# Altium PCB 112J-T.pcbdoc
Units mm, origin at the board's own origin, x right, y up, seen from the top; angles counter-clockwise.
Board outline 29.4 x 30.4 mm, 2 copper layers (Top Layer, Bottom Layer); 1 components, 0 nets, 13 pads, 0 vias.
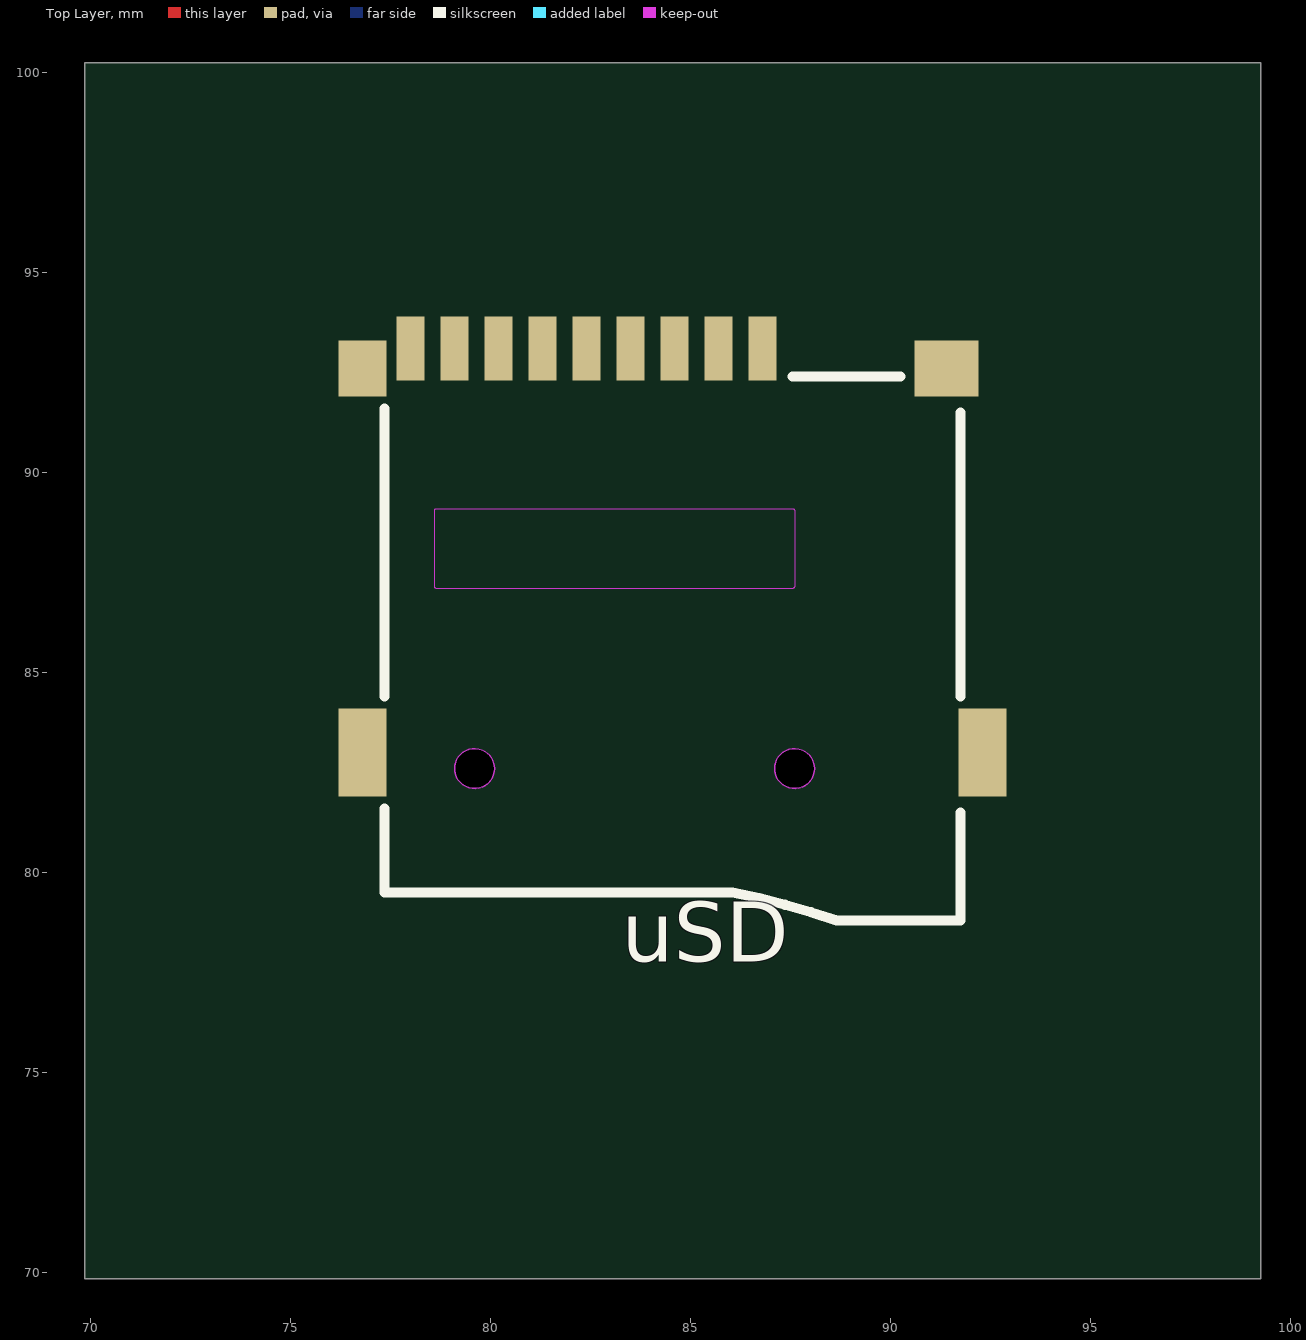
[diagram p0: Top Layer view]
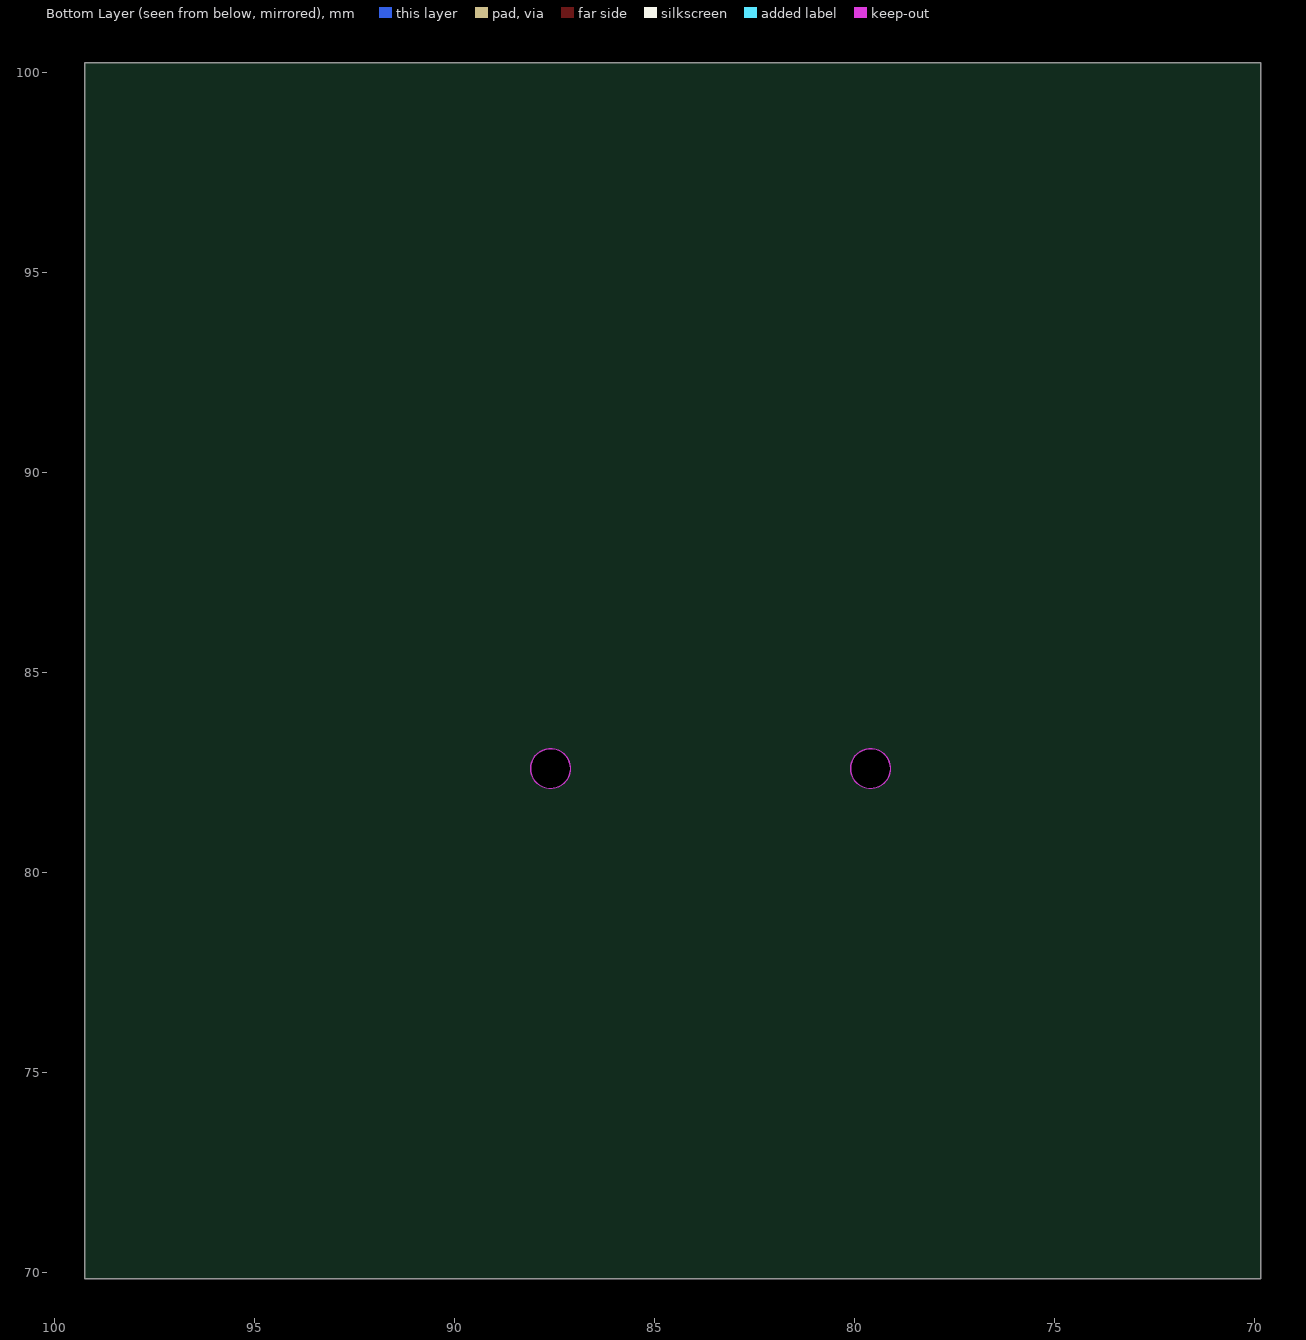
[diagram p1: Bottom Layer view, seen from below]

## Layer stack, top to bottom
Top Layer: signal copper (thickness not stored)
Dielectric: dielectric 0.32, FR-4, Dk 4.8
Bottom Layer: signal copper (thickness not stored)

## Board outline
99.25,69.85 69.85,69.85 69.85,100.25 99.25,100.25

## Design rules (kind name [scope] priority, off if disabled: settings)
BoardOutlineClearance safeClearance [All] p0: genericclearance=0.254 ignorepadtopadclearanceinfootprint=FALSE except(0: Arc-SplitContinuation Track-SplitContinuation SMDPad-SplitContinuation THPad-SplitContinuation Via-SplitContinuation Fill-SplitContinuation Poly-SplitContinuation Region-SplitContinuation Text-SplitContinuation; 0.152: Track-CutoutEdge SMDPad-CutoutEdge THPad-CutoutEdge Via-CutoutEdge Fill-CutoutEdge Region-CutoutEdge; 0.3: Track-OutlineEdge SMDPad-OutlineEdge THPad-OutlineEdge Via-OutlineEdge Fill-OutlineEdge Region-OutlineEdge Poly-OutlineEdge Text-OutlineEdge)
Clearance safeClearance [All] p1: gap=0.178 ignorepadtopadclearanceinfootprint=FALSE except(0.152: Track-Track Track-SMDPad SMDPad-SMDPad Track-THPad SMDPad-THPad THPad-THPad Track-Via SMDPad-Via THPad-Via Via-Via Track-Fill SMDPad-Fill THPad-Fill Via-Fill Fill-Fill Track-Region SMDPad-Region THPad-Region Via-Region Fill-Region Region-Region Track-Poly SMDPad-Poly THPad-Poly Via-Poly Fill-Poly Region-Poly Poly-Poly Track-Text SMDPad-Text THPad-Text Via-Text Fill-Text Region-Text Poly-Text Text-Text Track-Hole SMDPad-Hole THPad-Hole Via-Hole Fill-Hole Region-Hole Poly-Hole Text-Hole; 0.3: Track-Sheet SMDPad-Sheet THPad-Sheet Via-Sheet Fill-Sheet Region-Sheet Poly-Sheet Text-Sheet Sheet-Hole)
DiffPairsRouting differentialPair [All] p1: maxuncoupledlength=10 minlimit=6 maxlimit=6 mostfreqgap=6 toplayer_minwidth=5 toplayer_prefwidth=10 toplayer_maxwidth=100 bottomlayer_minwidth=5 bottomlayer_prefwidth=10 bottomlayer_maxwidth=100
PasteMaskExpansion pasteMaskExpansion [All] p1: expansion=0
PlaneConnect innerPlane [All] p1: planeconnectstyle=Relief reliefexpansion=0.508 reliefentries=4 reliefconductorwidth=0.254 reliefairgap=0.254
PolygonConnect copperRegion [All] p1: connectstyle=Relief reliefentries=4 reliefconductorwidth=10 polygonreliefangle="90 Angle" airgapwidth=10
RoutingVias viaSize [All] p1: viastyle="Through Hole" holewidth=12.0078 minholewidth=11.811 maxholewidth=236.2204 width=24.0158 minwidth=19.685 maxwidth=393.7008
SolderMaskExpansion solderMaskExpansion [All] p1: useseparateexpansions=TRUE expansion=4 expansionbottom=4
Width trackWidth [All] p1: maxlimit=100 minlimit=5 preferedwidth=10

## Components (designator, comment, footprint, x,y, rotation, side; value= is the part's Value field where it differs from the comment)
? "112J-T" 112J-T 84.55,82.6 r0 top

## Footprints (in the part's own frame and the unit in brackets; to place one, negate y for a bottom-side part, rotate by r counter-clockwise, add the part's x,y. Pads: shape width x height; smd on the part's side, far side on the other; paste and mask are expansions set on the pad)
112J-T [mm]
  rect 0.7x1.6 smd: 1(2.25,10.5) 2(1.15,10.5) 3(0.05,10.5) 4(-1.05,10.5) 5(-2.15,10.5) 6(-3.25,10.5) 7(-4.35,10.5) 8(-5.45,10.5) 9(-6.55,10.5)
  rect 1.2x1.4 smd: 10(-7.75,10)
  rect 1.6x1.4 smd: 11(6.85,10)
  rect 1.2x2.2 smd: 12(-7.75,0.4) 13(7.75,0.4)
  Top Layer keep-out region: -5.9,6.5 3,6.5 3.019,6.496 3.035,6.485 3.046,6.469 3.05,6.45 3.05,6.45 3.05,4.55 3.046,4.531 3.035,4.515 3.019,4.504 3,4.5 3,4.5 -5.9,4.5 -5.919,4.504 -5.935,4.515 -5.946,4.531 -5.95,4.55 -5.95,4.55 -5.95,6.45 -5.946,6.469 -5.935,6.485 -5.919,6.496 -5.9,6.5
  Board Outline Layer circle w0.025: c-4.95,0 r0.5
  Board Outline Layer circle w0.025: c3.05,0 r0.5
  Board Outline Layer region: -4.45,0 -4.5,-0.217 -4.638,-0.391 -4.839,-0.487 -5.061,-0.487 -5.262,-0.391 -5.4,-0.217 -5.45,0 -5.45,0 -5.4,0.217 -5.262,0.391 -5.061,0.487 -4.839,0.487 -4.638,0.391 -4.5,0.217 -4.45,0
  Board Outline Layer region: 3.55,0 3.5,-0.217 3.362,-0.391 3.161,-0.487 2.939,-0.487 2.738,-0.391 2.6,-0.217 2.55,0 2.55,0 2.6,0.217 2.738,0.391 2.939,0.487 3.161,0.487 3.362,0.391 3.5,0.217 3.55,0
  Multi-Layer board cut-out: -4.45,0 -4.5,-0.217 -4.638,-0.391 -4.839,-0.487 -5.061,-0.487 -5.262,-0.391 -5.4,-0.217 -5.45,0 -5.45,0 -5.4,0.217 -5.262,0.391 -5.061,0.487 -4.839,0.487 -4.638,0.391 -4.5,0.217 -4.45,0
  Multi-Layer board cut-out: 3.55,0 3.5,-0.217 3.362,-0.391 3.161,-0.487 2.939,-0.487 2.738,-0.391 2.6,-0.217 2.55,0 2.55,0 2.6,0.217 2.738,0.391 2.939,0.487 3.161,0.487 3.362,0.391 3.5,0.217 3.55,0
  silkscreen extent -7.2,-3.8 7.2,9.8

## Nets (pads, with @x,y where several pads share a name; then routed paths per layer and width w, separated by ;. In a path a pad name is that pad's centre, name@x,y a point inside that pad or via, vN(x,y) a via of type N, cw(c..) or ccw(c..) an arc to the next point about the centre after c; other vN are vias at no path point)
pads on no net: ?.1 ?.2 ?.3 ?.4 ?.5 ?.6 ?.7 ?.8 ?.9 ?.10 ?.11 ?.12 ?.13

## Text inside footprints (layer, text, board x,y; h text height)
?: Top Silkscreen Layer "uSD" at 83.28,77.774 h1.5